# Altium PCB Arm_controller.PcbDoc
Units mm, origin at the board's own origin, x right, y up, seen from the top; angles counter-clockwise.
Board outline 56.8 x 61.9 mm, 2 copper layers (Top Layer, Bottom Layer); 63 components, 57 nets, 260 pads, 164 vias.
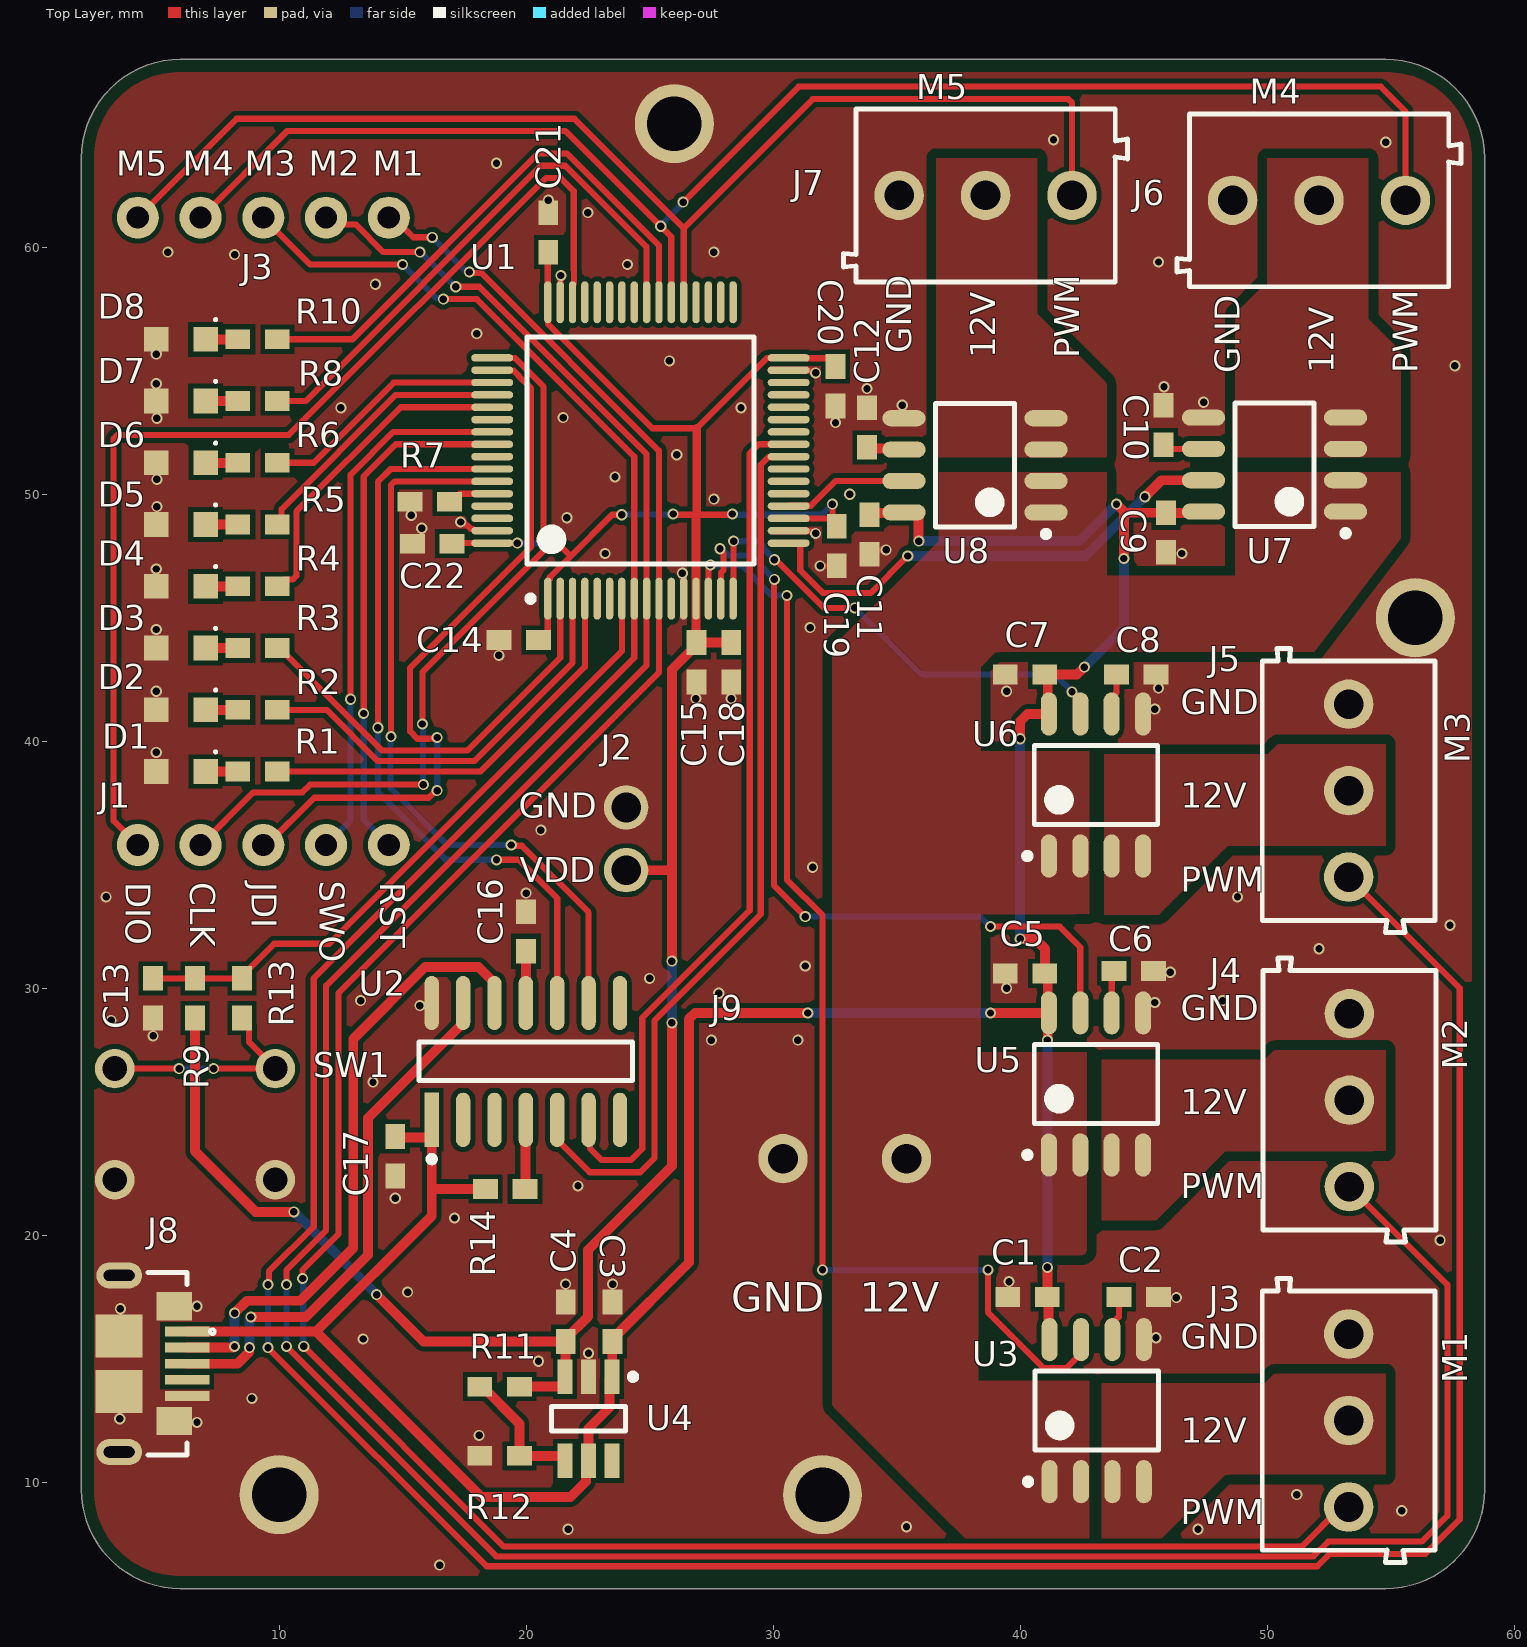
[diagram p0: Top Layer view]
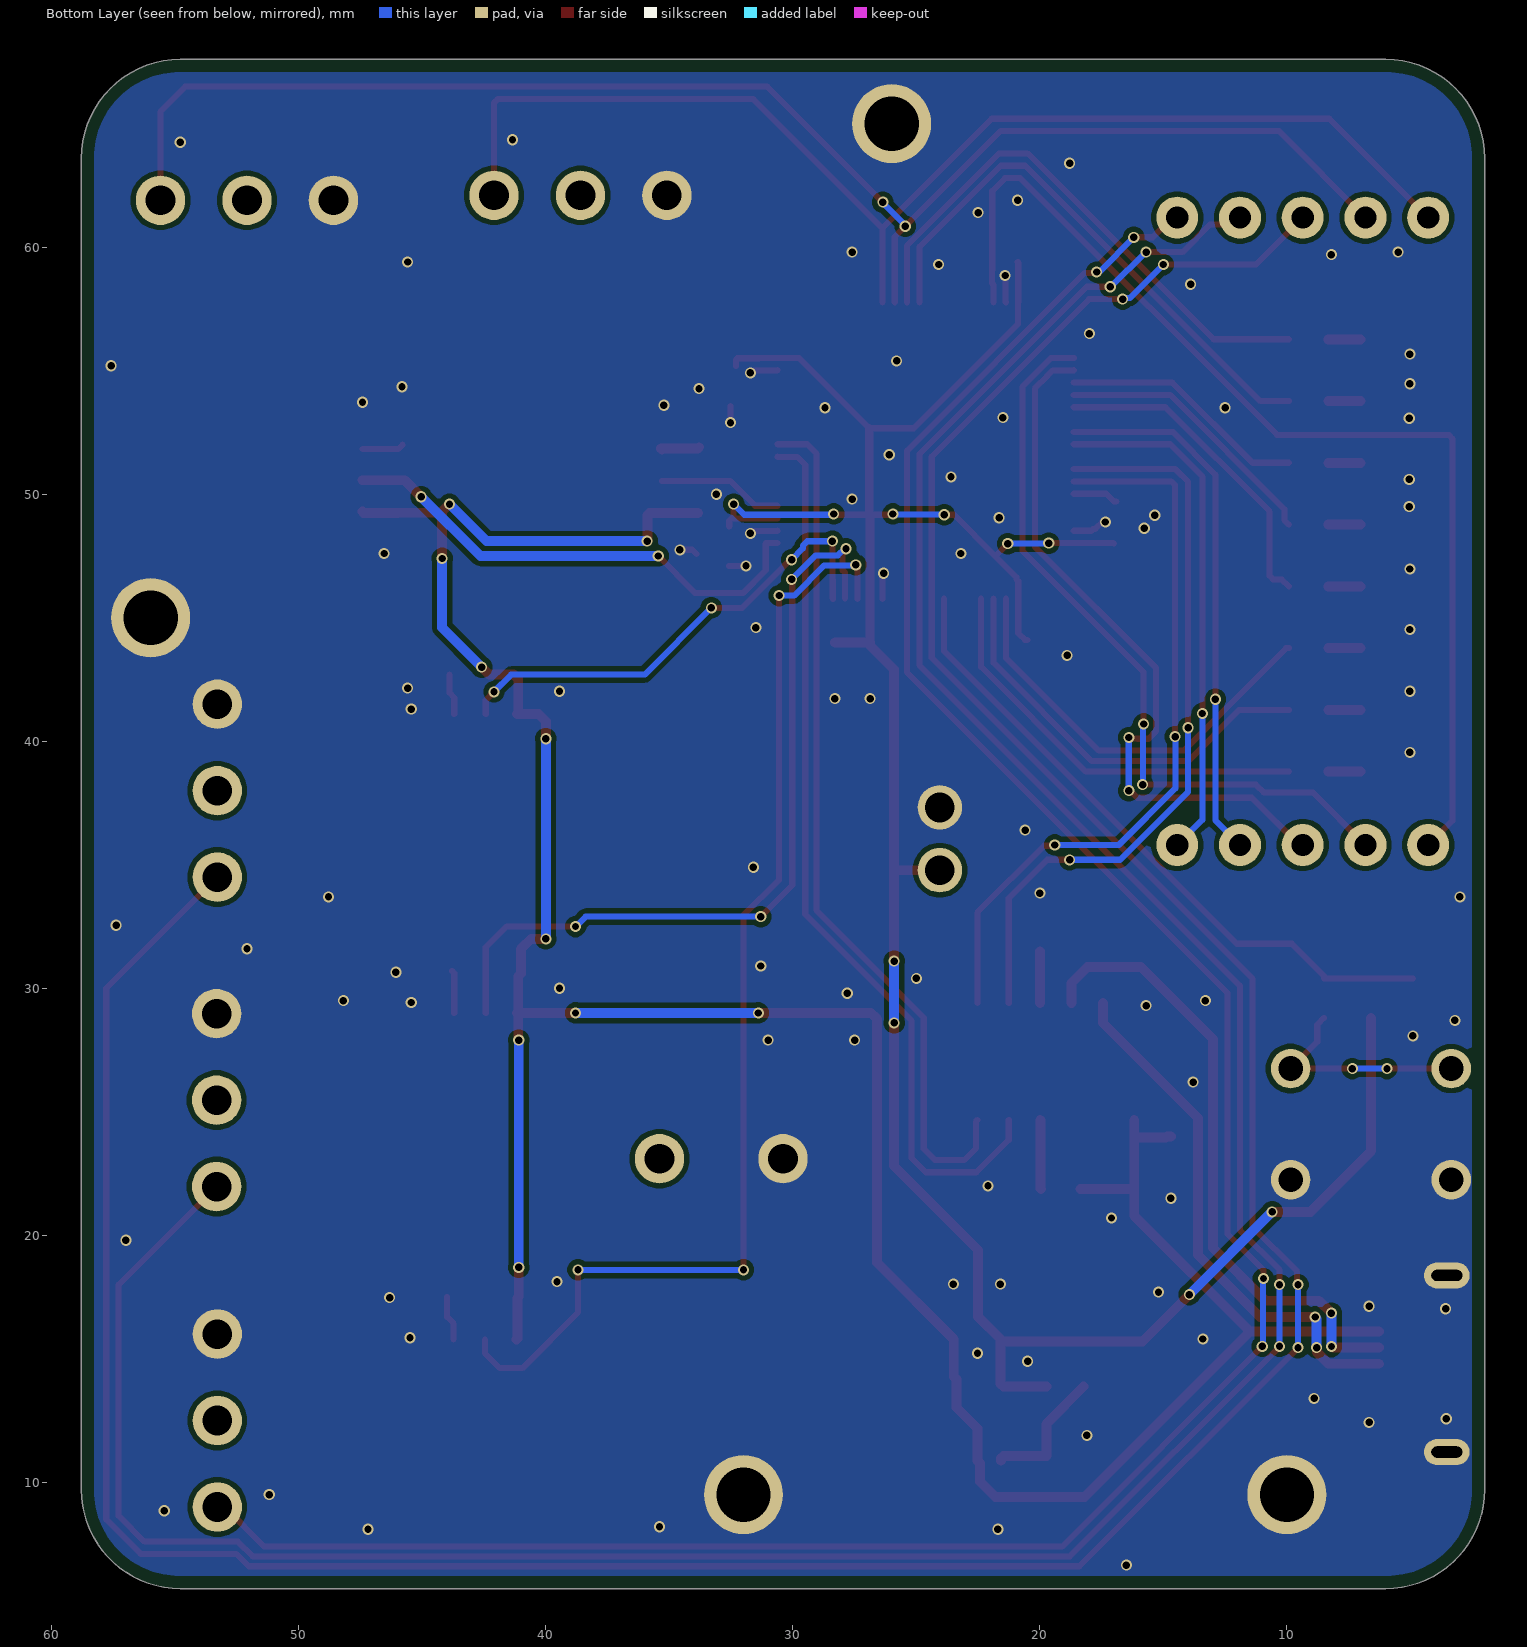
[diagram p1: Bottom Layer view, seen from below]
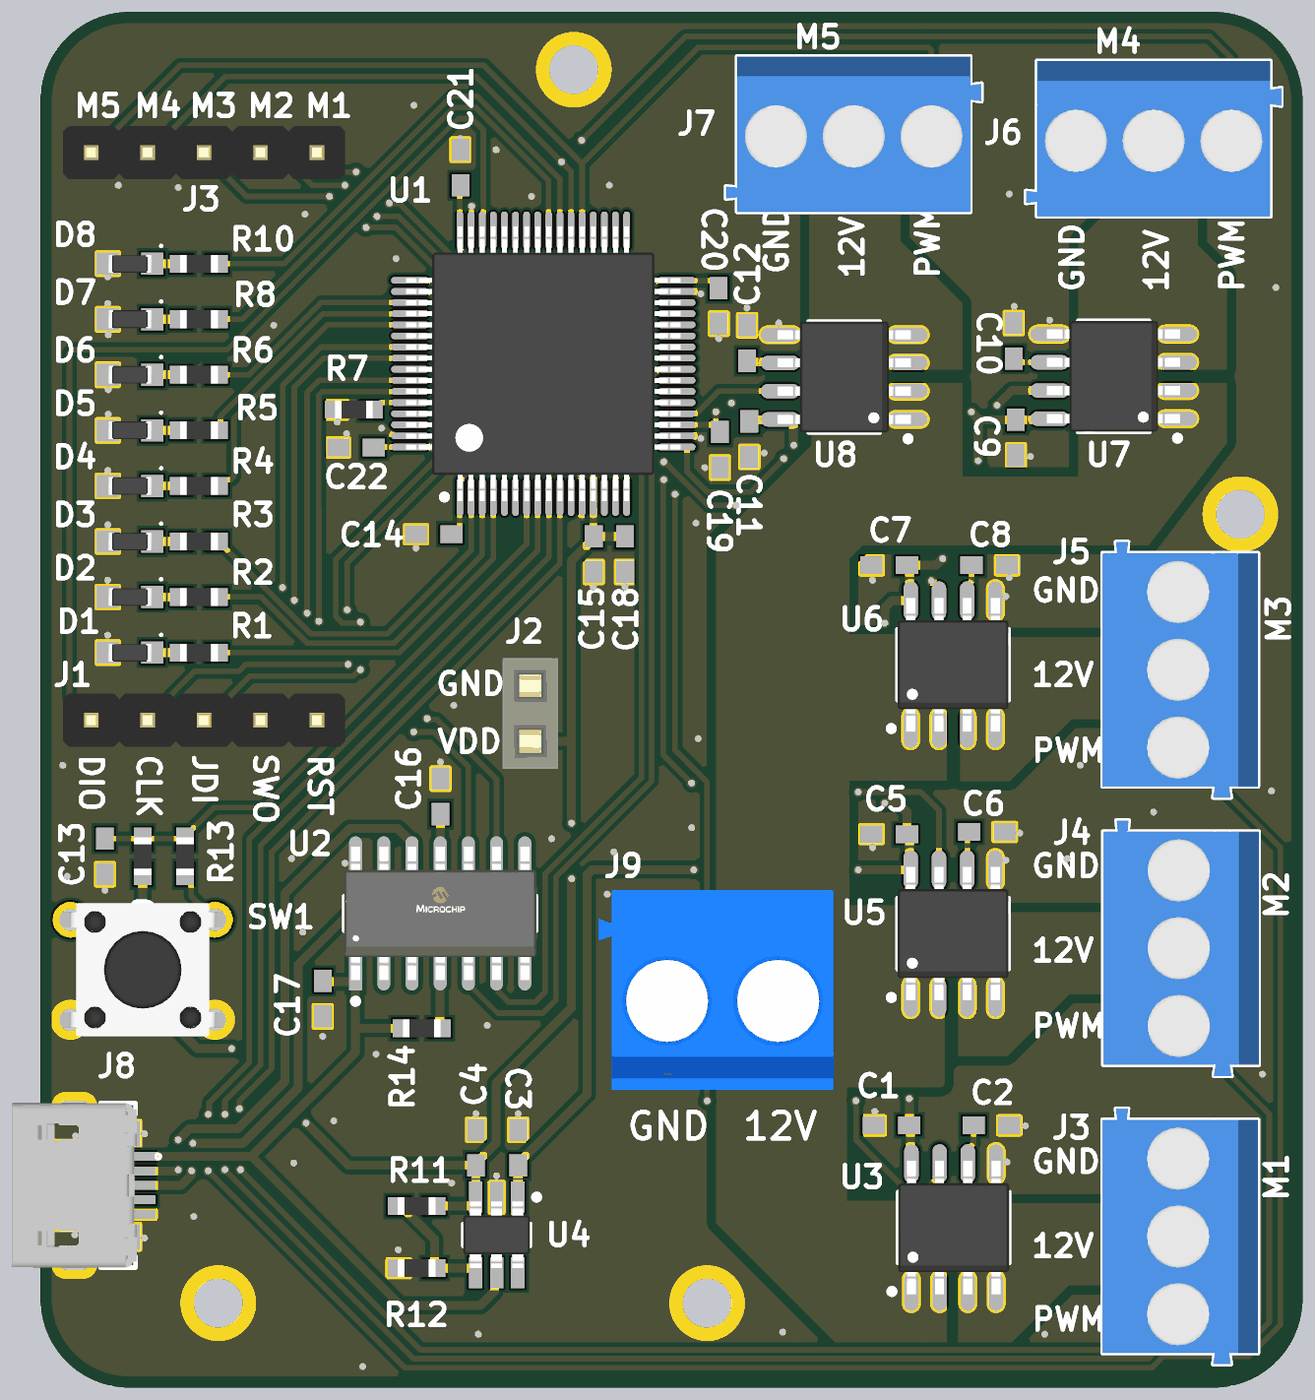
[diagram p2: 3D render of the assembled board from above, using the file's embedded part models]

## Layer stack, top to bottom
Top Solder: solder mask 0.0102, Solder Resist, Dk 3.5
Top Layer: signal copper 0.0356
Dielectric 1: dielectric 0.32, FR-4, Dk 4.8
Bottom Layer: signal copper 0.0356
Bottom Solder: solder mask 0.0102, Solder Resist, Dk 3.5

## Board outline
6,5.7 cw(c6,9.7) 2,9.7 2,63.6 cw(c6,63.6) 6,67.6 54.8,67.6 cw(c54.8,63.6) 58.8,63.6 58.8,9.7 cw(c54.8,9.7) 54.8,5.7

## Design rules (kind name [scope] priority, off if disabled: settings)
BoardOutlineClearance [All] p1: gap=0.254 ignorepadtopadclearanceinfootprint=FALSE except(0: Arc-SplitContinuation Track-SplitContinuation SMDPad-SplitContinuation THPad-SplitContinuation Via-SplitContinuation Fill-SplitContinuation Poly-SplitContinuation Region-SplitContinuation Text-SplitContinuation; 0.5: Arc-OutlineEdge Track-OutlineEdge SMDPad-OutlineEdge THPad-OutlineEdge Via-OutlineEdge Fill-OutlineEdge Poly-OutlineEdge Region-OutlineEdge Text-OutlineEdge)
Clearance [All] p1: gap=0.254 ignorepadtopadclearanceinfootprint=FALSE except(0.15: Arc-Track Arc-SMDPad Arc-THPad Arc-Via Arc-Hole Track-Track Track-SMDPad Track-THPad Track-Via Track-Hole SMDPad-SMDPad SMDPad-Via SMDPad-Hole THPad-Via THPad-Hole Via-Via Via-Hole Fill-Hole Poly-Hole Region-Hole Text-Hole; 0.2: Arc-Arc Arc-Poly Track-Poly SMDPad-THPad SMDPad-Poly THPad-THPad THPad-Poly Via-Poly Fill-Poly; 0.4: Poly-Poly)
MinimumSolderMaskSliver [All] p1: minsoldermaskwidth=0.2
PlaneClearance [All] p1: clearance=0.6
PlaneConnect [All] p1: planeconnectstyle=Direct reliefexpansion=0.508 reliefentries=4 reliefconductorwidth=0.254 reliefairgap=0.254
PolygonConnect [All] p1: connectstyle=Direct reliefconductorwidth=0.254 reliefentries=4 polygonreliefangle="90 Angle" airgapwidth=0.254
RoutingVias [All] p1: holewidth=0.2 width=0.6 viastyle="Through Hole" minholewidth=0.15 minwidth=0.3 maxholewidth=1 maxwidth=2
SilkToSilkClearance [All] p1: silktosilkclearance=0.2
SilkToSolderMaskClearance [IsPad] p1: minsilkscreentomaskgap=0.1 clearancetoexposedcopper=TRUE
SolderMaskExpansion [All] p1: expansion=0.102 istentingtop=FALSE
SupplyNets "Schematic Supply Nets_3" [InNet('12V')] p1: voltage=0.000
SupplyNets "Schematic Supply Nets_2" [InNet('VDD_CAP_filter_1')] p2: voltage=0.000
SupplyNets "Schematic Supply Nets_1" [InNet('VUSB (5V)')] p3: voltage=0.000
SupplyNets "Schematic Supply Nets" [InNet('GND')] p4: voltage=0.000
Width [All] p1: maxlimit=5 minlimit=0.2 preferedwidth=0.4
25 further rules are at their usual default settings.

## Classes and differential pairs
component class Signal_and_supply: C1 C2 C3 C4 C5 C6 C7 C8 C9 C10 C11 C12 J3 J4 J5 J6 J7 J9 R11 R12 U3 U4 U5 U6 U7 U8
component class MCU: C13 C14 C15 C16 C17 C18 C19 C20 C21 C22 D1 D2 D3 D4 D5 D6 D7 D8 J1 J3 J8 R1 R2 R3 R4 R5 R6 R7 R8 R9 R10 R13 R14 SW1 U1 U2

## Components (designator, comment, footprint, x,y, rotation, side; value= is the part's Value field where it differs from the comment)
C1 "Capacitor 0603 generic" CAPC1608X08N 40.3,17.5 r180 top
C2 "Capacitor 0603 generic" CAPC1608X08N 44.8,17.5 r0 top
C3 "Capacitor 0603 generic" CAPC1608X08N 23.5,16.5 r270 top
C4 "Capacitor 0603 generic" CAPC1608X08N 21.6,16.5 r90 top
C5 "Capacitor 0603 generic" CAPC1608X08N 40.2,30.6 r180 top
C6 "Capacitor 0603 generic" CAPC1608X08N 44.6,30.7 r0 top
C7 "Capacitor 0603 generic" CAPC1608X08N 40.2,42.7 r180 top
C8 "Capacitor 0603 generic" CAPC1608X08N 44.7,42.7 r0 top
C9 "Capacitor 0603 generic" CAPC1608X08N 45.9,48.45 r270 top
C10 "Capacitor 0603 generic" CAPC1608X08N 45.8,52.8 r90 top
C11 "Capacitor 0603 generic" CAPC1608X08N 33.9,48.375 r270 top
C12 "Capacitor 0603 generic" CAPC1608X08N 33.8,52.7 r90 top
C13 "Capacitor 0603 generic" CAPC1608X08N 4.9,29.6 r90 top
C14 "Capacitor 0603 generic" CAPC1608X08N 19.7,44.1 r180 top
C15 "Capacitor 0603 generic" CAPC1608X08N 26.9,43.2 r270 top
C16 "Capacitor 0603 generic" CAPC1608X08N 20,32.3 r90 top
C17 "Capacitor 0603 generic" CAPC1608X08N 14.7,23.2 r270 top
C18 "Capacitor 0603 generic" CAPC1608X08N 28.304,43.198 r270 top
C19 "Capacitor 0603 generic" CAPC1608X08N 32.575,47.9 r270 top
C20 "Capacitor 0603 generic" CAPC1608X08N 32.525,54.375 r270 top
C21 "Capacitor 0603 generic" CAPC1608X08N 20.9,60.6 r90 top
C22 "Capacitor 0603 generic" CAPC1608X08N 16.2,48 r180 top
D1 "KP-1608ZGC" DIOM1608X11N 6.028,38.772 r0 top
D2 "KP-1608ZGC" DIOM1608X11N 6.028,41.272 r0 top
D3 "KP-1608ZGC" DIOM1608X11N 6.028,43.772 r0 top
D4 "KP-1608ZGC" DIOM1608X11N 6.028,46.272 r0 top
D5 "KP-1608ZGC" DIOM1608X11N 6.028,48.772 r0 top
D6 "KP-1608ZGC" DIOM1608X11N 6.028,51.272 r0 top
D7 "KP-1608ZGC" DIOM1608X11N 6.028,53.772 r0 top
D8 "KP-1608ZGC" DIOM1608X11N 6.028,56.272 r0 top
J1 "Header-2.54-ZL201-05G" Header-2.54-ZL201-05G-Footprint-1 9.36,35.8 r0 top
J2 "2_pin_f_2_54" 2_pin_f_2_54-Footprint-1 24.05,36.05 r180 top
J3 "691103110003" 691103110003 53.3,12.5 r90 top
J3 "Header-2.54-ZL201-05G" Header-2.54-ZL201-05G-Footprint-1 9.36,61.2 r180 top
J4 "691103110003" 691103110003 53.328,25.472 r90 top
J5 "691103110003" 691103110003 53.3,38 r90 top
J6 "691103110003" 691103110003 52.1,61.9 r180 top
J7 "691103110003" 691103110003 38.6,62.1 r180 top
J8 "USB3076" USB3076-XX-X_revC 3.5,14.8 r270 top
J9 "5mmScrewTerminal" 5mmScrewTerminal-Footprint-1 32.9,23.1 r0 top
R1 "Resistor 0603 generic" RESC1608X04N 9.128,38.772 r180 top
R2 "Resistor 0603 generic" RESC1608X04N 9.128,41.272 r180 top
R3 "Resistor 0603 generic" RESC1608X04N 9.128,43.772 r180 top
R4 "Resistor 0603 generic" RESC1608X04N 9.128,46.272 r180 top
R5 "Resistor 0603 generic" RESC1608X04N 9.128,48.772 r180 top
R6 "Resistor 0603 generic" RESC1608X04N 9.128,51.272 r180 top
R7 "Resistor 0603 generic" RESC1608X04N 16.1,49.7 r0 top
R8 "Resistor 0603 generic" RESC1608X04N 9.128,53.772 r180 top
R9 "Resistor 0603 generic" RESC1608X04N 6.6,29.6 r90 top
R10 "Resistor 0603 generic" RESC1608X04N 9.128,56.272 r180 top
R11 "Resistor 0603 generic" RESC1608X04N 18.928,13.872 r180 top
R12 "Resistor 0603 generic" RESC1608X04N 18.928,11.072 r180 top
R13 "Resistor 0603 generic" RESC1608X04N 8.5,29.6 r270 top
R14 "Resistor 0603 generic" RESC1608X04N 19.158,21.872 r180 top
SW1 "NRST" "Button 6mm tht-Footprint-1" 6.6,24.5 r0 top
U1 "STM32F303RDT7" LQFP50P1235X1235X165-64N 24.628,51.772 r90 top
U2 "mcp2221_usb_uart" FP-C04-065-SL-IPC_B 19.988,27.038 r90 top
U3 "ACS712" SOIC127P600X175-8N 43.1,12.9 r90 top
U4 "MAX8880EUT+T" SOT95P280X145-6N 22.528,12.572 r270 top
U5 "ACS712" SOIC127P600X175-8N 43.072,26.128 r90 top
U6 "ACS712" SOIC127P600X175-8N 43.072,38.228 r90 top
U7 "ACS712" SOIC127P600X175-8N 50.3,51.2 r180 top
U8 "ACS712" SOIC127P600X175-8N 38.172,51.172 r180 top

## Footprints (in the part's own frame and the unit in brackets; to place one, negate y for a bottom-side part, rotate by r counter-clockwise, add the part's x,y. Pads: shape width x height; smd on the part's side, far side on the other; paste and mask are expansions set on the pad)
2_pin_f_2_54-Footprint-1 [mm]
  round 1.8 hole 1.2: 1(0,1.27) 2(0,-1.27)
  body extent -1.25,-2.48 1.25,2.52, height 9
5mmScrewTerminal-Footprint-1 [mm]
  round 2 hole 1.2: 1(-2.5,0) 2(2.5,0)
  body extent -5.8,-4 4.8,5, height 12.6
691103110003 [mm] "3,50mm - modular - blue - Horizontal wire entry - Pressure clamp - 8,4mm height - 03p"
  round 2 hole 1.2: 1(-3.5,0) 2(0,0) 3(3.5,0)
  silkscreen extent -5.75,-3.5 5.75,3.5, body extent -5.75,-3.5 5.75,3.5, height 8.45
"Button 6mm tht-Footprint-1" [mm]
  round 1.6 hole 1: 1(-3.25,2.25) 1(3.25,2.25) 2(-3.25,-2.25) 2(3.25,-2.25)
  body extent -3.95,-3 3.95,3, height 5
CAPC1608X08N [mm] "Chip Capacitor, 2-Leads, Body 1,60x0,75mm, IPC Medium Density"
  rect 1x0.8 smd: 1(-0.8,0) 2(0.8,0)
  body extent -0.85,-0.4 0.85,0.4, height 0.8
DIOM1608X11N [mm] "Molded Diode, 2-Leads, Body 1,60x0,80mm, IPC Medium Density"
  rect 1x1 smd: 1(-1,0) 2(1,0)
  silkscreen extent 1.35,0.75 1.45,0.85, body extent -1.02,-0.4 1.02,0.4, height 1.1
FP-C04-065-SL-IPC_B [mm]
  rect 2.2x0.582 smd paste+0 mask+0: 1(-2.366,3.81)
  rrect100% 2.2x0.582 smd paste+0 mask+0: 2(-2.366,2.54) 3(-2.366,1.27) 4(-2.366,0) 5(-2.366,-1.27) 6(-2.366,-2.54) 7(-2.366,-3.81) 8(2.366,-3.81) 9(2.366,-2.54) 10(2.366,-1.27) 11(2.366,0) 12(2.366,1.27) 13(2.366,2.54) 14(2.366,3.81)
  silkscreen extent -4.08,-4.33 0.78,4.33, body extent -3.7,-4.57 3.7,4.57, height 0.25
Header-2.54-ZL201-05G-Footprint-1 [mm]
  round 1.7 hole 0.9: 1(-5.08,0) 2(-2.54,0) 3(0,0) 4(2.54,0) 5(5.08,0)
  body extent -6.35,-1.27 6.35,1.13, height 8.56
LQFP50P1235X1235X165-64N [mm] "SQFP, 64-Leads, Body 10,00x10,00mm, Pitch 0,50mm, IPC Medium Density"
  oval 1.7x0.3 smd: 1(-6,3.75) 2(-6,3.25) 3(-6,2.75) 4(-6,2.25) 5(-6,1.75) 6(-6,1.25) 7(-6,0.75) 8(-6,0.25) 9(-6,-0.25) 10(-6,-0.75) 11(-6,-1.25) 12(-6,-1.75) 13(-6,-2.25) 14(-6,-2.75) 15(-6,-3.25) 16(-6,-3.75) 33(6,-3.75) 34(6,-3.25) 35(6,-2.75) 36(6,-2.25) 37(6,-1.75) 38(6,-1.25) 39(6,-0.75) 40(6,-0.25) 41(6,0.25) 42(6,0.75) 43(6,1.25) 44(6,1.75) 45(6,2.25) 46(6,2.75) 47(6,3.25) 48(6,3.75)
  oval 0.3x1.7 smd: 17(-3.75,-6) 18(-3.25,-6) 19(-2.75,-6) 20(-2.25,-6) 21(-1.75,-6) 22(-1.25,-6) 23(-0.75,-6) 24(-0.25,-6) 25(0.25,-6) 26(0.75,-6) 27(1.25,-6) 28(1.75,-6) 29(2.25,-6) 30(2.75,-6) 31(3.25,-6) 32(3.75,-6) 49(3.75,6) 50(3.25,6) 51(2.75,6) 52(2.25,6) 53(1.75,6) 54(1.25,6) 55(0.75,6) 56(0.25,6) 57(-0.25,6) 58(-0.75,6) 59(-1.25,6) 60(-1.75,6) 61(-2.25,6) 62(-2.75,6) 63(-3.25,6) 64(-3.75,6)
  silkscreen extent -6.12,-4.6 4.6,4.6, body extent -6.17,-6.17 6.17,6.17, height 1.65
RESC1608X04N [mm] "Chip Resistor, 2-Leads, Body 1,60x0,75mm, IPC Medium Density"
  rect 1x0.8 smd: 1(-0.8,0) 2(0.8,0)
  body extent -0.85,-0.4 0.85,0.4, height 0.4
SOIC127P600X175-8N [mm] "SOIC, 8-Leads, Body 4,90x3,90mm, Pitch 1,27mm, IPC Medium Density"
  oval 1.75x0.65 smd: 1(-2.875,1.905) 2(-2.875,0.635) 3(-2.875,-0.635) 4(-2.875,-1.905) 5(2.875,-1.905) 6(2.875,-0.635) 7(2.875,0.635) 8(2.875,1.905)
  silkscreen extent -3,-2.5 1.6,2.9, body extent -3,-2.5 3,2.5, height 1.75
SOT95P280X145-6N [mm] "SOT23, 6-Leads, Body 2,90x2,80mm, Pitch 0,95mm, IPC Medium Density"
  rect 1.4x0.6 smd: 1(-1.7,0.95) 2(-1.7,0) 3(-1.7,-0.95) 4(1.7,-0.95) 5(1.7,0) 6(1.7,0.95)
  silkscreen extent -1.82,-1.5 0.5,1.93, body extent -1.5,-1.5 1.5,1.5, height 1.45
USB3076-XX-X_revC [mm] "Micro USB Receptacle, Type B, SMT, Horizontal, Bottom Mount, without Peg, with Outer Shell Stakes, without Mating Face Lead-In"
  rect 0.4x1.8 smd: 1(-1.3,2.775) 2(-0.65,2.775) 3(0,2.775) 4(0.65,2.775) 5(1.3,2.775)
  oval 1.05x1.85 hole 0.45 slot 1.25 at 90 deg: S(-3.575,0.025) S(3.575,0.025)
  rect 1.15x1.45 smd: S(-2.32,2.255) S(2.32,2.255)
  rect 1.75x1.9 smd: S(-1.125,0.025) S(1.125,0.025)
  silkscreen extent -3.7,1.2 3.7,3.9, body extent -3.7,-2.77 3.7,2.83, height 2.69

## Part data
C1 C5 C7 C9 C11: library part CMP-001-00083-2, "Generic 0603 capacitor. No set voltage/capacitance rating.", Capacitance="0.1 uF"
C2 C6 C8 C10 C12: library part CMP-001-00083-2, "Generic 0603 capacitor. No set voltage/capacitance rating.", Capacitance="1 nF"
C3 C13 C16 C18: library part CMP-001-00083-2, "Generic 0603 capacitor. No set voltage/capacitance rating.", Capacitance="1 uF"
C4 C14 C17: library part CMP-001-00083-2, "Generic 0603 capacitor. No set voltage/capacitance rating.", Capacitance="4.7 uF"
C15: library part CMP-001-00083-2, "Generic 0603 capacitor. No set voltage/capacitance rating.", Capacitance="10 nF"
C19 C20 C21 C22: library part CMP-001-00083-2, "Generic 0603 capacitor. No set voltage/capacitance rating.", Capacitance="100 nF"
D1 D2 D3 D4 D5 D6 D7 D8: library part CMP-007-00036-1, "Single Color LED, Green, Water Clear, 1.2mm", Forward Current=25mA, Max Operating Temperature=85°C, Min Operating Temperature=-40°C, Mounting Technology="Surface Mount", Pins=2, RoHS Compliant=Yes
J1 J3: library part CMP-00028-00007-3, "Male header, pitch 2.54 mm, 1x5 pins"
J2: library part CMP-00028-00011-1, "2 pin female header, 2.54 mm pitch."
J3 J4 J5 J6 J7: library part CMP-00028-00008-2, "Barrier Strip Terminal Block", RoHS Compliant=Yes
J8: library part CMP-003-000000-4, "Micro USB Receptacle, Type B, SMT, Horizontal, Bottom Mount, without Peg, with Outer Shell Stakes, without Mating Face Lead-In", Component Type=Standard, Design Item ID=USB3076-XX-X_revC, Pin Count=6, Source=USB3076-XX-X_revC.SchLib
J9: library part CMP-00028-00010-3, "16A 5 mm pitch screw terminal, 2 sockets."
R1 R2 R3 R4 R5 R6 R8 R10: library part CMP-009-00177-2, "Generic 0603 resistor, no fixed value.", Resistance=220
R7 R9 R14: library part CMP-009-00177-2, "Generic 0603 resistor, no fixed value.", Resistance=10k
R11: library part CMP-009-00177-2, "Generic 0603 resistor, no fixed value.", Resistance=100k
R12: library part CMP-009-00177-2, "Generic 0603 resistor, no fixed value.", Resistance=160k
R13: library part CMP-009-00177-2, "Generic 0603 resistor, no fixed value.", Resistance=100
SW1: library part CMP-00028-00009-2, "Button 6mm tht", Pins=2
U1: library part CMP-020-00023-3, "ARM Microcontroller, 32-Bit, FLASH, CORTEX-M4F CPU, 72MHz, CMOS, LQFP64", Case/Package=LQFP, Max Operating Temperature=105°C, Min Operating Temperature=-40°C, Interface=I2C,SPI,USB,CAN,I2S,IrDA,UART,USART,LIN, Pins=64, RoHS Compliant=Yes
U2: library part CMP-015-00009-2, "Usb uart converter.", Case/Package=SOP, Max Operating Temperature=85°C, Max Supply Voltage=5.5V, Min Operating Temperature=-40°C, Min Supply Voltage=3V, Nominal Supply Voltage=3.3V, Pins=14, RoHS Compliant=Yes
U3 U5 U6 U7 U8: library part CMP-010-00024-2, "Integrated, Hall-Effect-Based Linear Current Sensor IC", Case/Package=SOIC8, Max Operating Temperature=85°C, Max Supply Voltage=8V, Min Operating Temperature=-40°C, Min Supply Voltage=4.5V, Nominal Supply Current=10mA, Nominal Supply Voltage=5V, Output Current=3mA, ComponentLink1Description=Datasheet, ComponentLink1URL=https://www.farnell.com/datasheets/3283075.pdf?_gl=1*655fm5*_gcl_aw*R0NMLjE3MjkyNjA3NzYuQ2p3S0NBandqc2k0QmhCNUVpd0FGQUwwWUJJQ1IwTktsZUpReWIxcFRubGxNLVh3bUhQcFctSFhLUnYtVFFUc01qMmhGYkt5YWJZdmpob0N3c0lRQXZEX0J3RQ..*_gcl_au*MTA1Mjg3ODU0LjE3Mjc3MDI1ODg., Mounting Technology=smd, Pins=8, RoHS Compliant=yes, Sensor Type="analog current sensor"
U4: library part CMP-019-00049-1, "Ultra-Low-IQ, Low-Dropout Linear Regulator, output 1.25 - 5.5 V.", Case/Package=SOT-6, Dropout Voltage=100mV, Max Operating Temperature=125°C, Max Supply Voltage=12V, Min Operating Temperature=-40°C, Min Supply Voltage=2.5V, Nominal Supply Current=3mA, Output Current=200mA, Output Voltage=3.3V, Mounting Technology=smd, Pins=6, RoHS Compliant=yes

## Free pads (board coordinates)
  round 3.2 hole 2.2: 0(10,9.5) 0(26,65) 0(32,9.5) 0(56,45)

## Via types
v1: diameter 0.45, hole 0.3, Top Layer to Bottom Layer, tented both sides, 164 vias

## Nets (pads, with @x,y where several pads share a name; then routed paths per layer and width w, separated by ;. In a path a pad name is that pad's centre, name@x,y a point inside that pad or via, vN(x,y) a via of type N, cw(c..) or ccw(c..) an arc to the next point about the centre after c; other vN are vias at no path point)
12V: J9.2 U3.1 U3.2 U5.1 U5.2 U6.1 U6.2 U7.1 U7.2 U8.1 U8.2
GND: C1.2 C2.2 C3.1 C4.2 C5.2 C6.2 C7.2 C8.2 C9.2 C10.2 C11.2 C12.2 C13.1 C14.2 C15.2 C16.2 C17.2 C18.2 C19.2 C20.2 C21.2 C22.2 D1.1 D2.1 D3.1 D4.1 D5.1 D6.1 D7.1 D8.1 J2.2 J3.3@53.3,16 J4.3 J5.3 J6.3 J7.3 J8.5 J8.S J9.1 pad.0 R7.1 R12.2 SW1.2 U1.12 U1.18 U1.31 U1.47 U1.63 U2.14 U3.5 U4.2 U5.5 U6.5 U7.5 U8.5 | length 7.9
  Top Layer w0.25: v1(17.35,48.875) 17.36,48.865 17.484,48.865 17.752,48.597 17.84,48.597 17.915,48.522 U1.63 ; U1.47 21.388,57.781 21.388,58.834 v1(21.407,58.854) ; v1(26.325,46.8) 26.325,46.786 26.369,46.743 26.369,45.781 U1.12 ; U1.18 30.638,48.512 31.567,48.512 31.666,48.413 v1(31.72,48.413) ; U1.31 30.638,55.012 31.567,55.012 31.666,54.913 v1(31.72,54.913) ; v1(31.9,47.1) C19.2 ; v1(32.525,52.9) C20.2 ; C11.2 34.075,47.75 v1(34.575,47.75)
  other v1: 16.5,6.65 21.7,8.1 47.2,8.1 35.4,8.2 55.45,8.85 51.2,9.5 18.1,11.9 6.675,12.425 3.55,12.575 8.9,13.4 20.5,14.9 22.525,15.225 13.4,15.8 45.5,15.85 3.575,17.025 6.675,17.125 46.325,17.475 15.2,17.7 21.6,18.025 23.5,18.025 39.55,18.125 57,19.8 17.1,20.7 14.7,21.5 22.1,22 13.8,26.2 27.5,27.9 31,27.9 4.9,28.075 3.2,28.7 15.7,29.3 45.45,29.425 13.3,29.5 48.2,29.5 27.8,29.8 39.45,30 25,30.4 46.075,30.65 31.3,30.9 52.1,31.6 57.4,32.55 3,33.7 48.8,33.7 20,33.85 31.6,34.9 20.6,36.4 5.025,39.55 45.45,41.3 26.875,41.725 28.3,41.725 5.025,42.025 39.45,42.025 45.6,42.15 18.9,43.475 5.025,44.525 31.5,44.6 5.025,46.975 23.2,47.6 46.55,47.6 15.775,48.625 21.65,49.05 15.35,49.15 5.05,49.5 27.6,49.8 33.1,50 5.05,50.6 23.6,50.7 26.1,51.6 5.05,53.075 21.5,53.1 12.5,53.5 28.7,53.5 35.225,53.6 47.425,53.725 33.8,54.275 45.825,54.35 5.025,54.475 57.6,55.2 25.8,55.4 5.025,55.675 18,56.5 13.9,58.5 24.1,59.3 45.6,59.4 8.2,59.7 5.5,59.8 27.6,59.8 22.5,61.4 20.9,61.9 18.8,63.4 54.8,64.25 41.35,64.35
I2C1_SCL: U1.58 U2.10 | length 30.7
  Top Layer w0.25: v1(14,40.548) 14,50.5 14.522,51.022 U1.58 ; v1(18.8,35.2) 19.7,35.2 21.258,33.642 U2.10
  Bottom Layer w0.25: v1(14,40.548) 14,37.951 16.751,35.2 v1(18.8,35.2)
I2C1_SDA: U1.59 U2.9 | length 30.2
  Top Layer w0.25: v1(14.529,40.186) 14.529,45.321 14.525,45.325 14.525,50.367 14.679,50.522 U1.59 ; v1(19.4,35.8) 19.429,35.771 19.829,35.771 22.528,33.072 U2.9
  Bottom Layer w0.25: v1(14.529,40.186) 14.512,40.17 14.512,38.088 16.8,35.8 v1(19.4,35.8)
JTDI: J1.3 U1.50 | length 29.1
  Top Layer w0.25: J1.3 9.509,35.8 11.422,37.714 16.059,37.714 16.346,38 v1(16.4,38) ; v1(16.4,40.15) 16.362,40.112 16.06,40.112 16.048,40.1 15.6,40.1 15.3,40.4 15.3,42.97 20.2,47.87 20.2,54.283 19.7,54.783 19.7,54.8 19.488,55.012 18.638,55.012 U1.50
  Bottom Layer w0.25: v1(16.4,38) v1(16.4,40.15)
JTDO: J1.4 U1.55 | length 21.9
  Top Layer w0.25: v1(12.895,41.7) 12.895,50.795 14.622,52.522 U1.55
  Bottom Layer w0.25: J1.4 12.895,36.795 v1(12.895,41.7)
JTRST: J1.5 U1.56 | length 21.1
  Top Layer w0.25: v1(13.424,41.124) 13.424,50.724 14.722,52.022 U1.56
  Bottom Layer w0.25: v1(13.424,41.124) 13.424,36.816 J1.5
LED_DEBUG_1: R10.1 U1.39 | length 22.4
  Top Layer w0.25: R10.1 12.972,56.272 20.5,63.8 21.652,63.8 25.378,60.073 U1.39
LED_DEBUG_2: R8.1 U1.40 | length 22.5
  Top Layer w0.25: R8.1 11.072,53.772 20.6,63.3 21.586,63.3 24.869,60.017 24.869,57.781 U1.40
LED_DEBUG_3: R6.1 U1.51 | length 10
  Top Layer w0.25: R6.1 11.394,51.272 14.644,54.522 U1.51
LED_DEBUG_4: R5.1 U1.52 | length 11.1
  Top Layer w0.25: R5.1 10.1,48.943 10.1,49.4 14.722,54.022 U1.52
LED_DEBUG_5: R4.1 U1.53 | length 13.2
  Top Layer w0.25: R4.1 10.203,46.547 10.557,46.547 10.703,46.693 10.703,49.303 14.922,53.522 U1.53
LED_DEBUG_6: R3.1 U1.2 | length 17.1
  Top Layer w0.25: R3.1 10.028,43.772 14.179,39.621 17.621,39.621 21.378,43.378 U1.2
LED_DEBUG_7: R2.1 U1.3 | length 17
  Top Layer w0.25: R2.1 11.928,41.272 14,39.2 17.9,39.2 21.878,43.178 U1.3
LED_DEBUG_8: R1.1 U1.4 | length 17
  Top Layer w0.25: R1.1 18.14,38.772 22.378,43.01 U1.4
MCU_NRST: C13.2 R9.2 R13.1 U1.7 | length 26.6
  Top Layer w0.25: C13.2 R9.2 R13.1 8.5,30.5 9.8,31.8 12.031,31.8 23.878,43.647 U1.7
Motor1_Power: J3.2@53.3,12.5 U3.3 U3.4
Motor1_PWM: J3.1 U1.10 | length 103.4
  Top Layer w0.25: v1(10.95,18.25) 10.95,18.6 12.4,20.05 12.4,29.8 25.378,42.778 U1.10 25.378,51.763 18.184,58.958 17.742,58.958 v1(17.704,58.996) ; v1(11,15.5) 19.1,7.4 51.4,7.4 53,9 J3.1@53.3,9 ; J3.1@14.44,61.2 14.63,61.2 15.43,60.4 v1(16.2,60.4)
  Bottom Layer w0.25: v1(10.95,18.25) 10.975,18.225 10.975,15.525 v1(11,15.5) ; v1(16.2,60.4) 17.565,59.035 17.665,59.035 v1(17.704,58.996)
Motor2_Power: J4.2 U5.3 U5.4
Motor2_PWM: J3.2@11.9,61.2 J4.1 U1.9 | length 125.3
  Top Layer w0.25: v1(10.3,15.5) 10.3,15.493 18.793,7 51.866,7 52.466,7.6 56.254,7.6 57.3,8.646 57.3,18 J4.1 ; v1(10.3,18) 10.3,18.6 11.9,20.2 11.9,30.1 24.878,43.078 U1.9 24.878,51.622 18.1,58.4 v1(17.15,58.4) ; J3.2@11.9,61.2 12.177,60.923 13.103,60.923 14.226,59.8 v1(15.7,59.8)
  Bottom Layer w0.25: v1(10.3,15.5) v1(10.3,18) ; v1(15.7,59.8) 15.725,59.8 17.125,58.4 v1(17.15,58.4)
Motor3_Power: J5.2 U6.3 U6.4
Motor3_PWM: J3.3@9.36,61.2 J5.1 U1.8 | length 141.8
  Top Layer w0.25: J3.3@9.36,61.2 11.26,59.3 v1(15,59.3) ; v1(9.55,15.45) 18.4,6.6 52.031,6.6 52.531,7.1 56.401,7.1 57.8,8.499 57.8,30 J5.1 ; v1(9.55,18) 9.588,18.038 9.588,18.538 11.4,20.35 11.4,30.4 24.378,43.378 U1.8 24.378,51.522 18,57.9 v1(16.65,57.9)
  Bottom Layer w0.25: v1(9.55,15.45) v1(9.55,18) ; v1(15,59.3) 16.362,57.938 16.612,57.938 v1(16.65,57.9)
Motor4_Power: J6.2 U7.3 U7.4
Motor4_PWM: J3.4 J6.1 U1.38 | length 61
  Top Layer w0.25: J3.4 10.32,64.7 21.6,64.7 25.878,60.422 U1.38 ; v1(26.356,61.825) 31.031,66.5 54.6,66.5 55.6,65.5 J6.1@55.6,62.381
  Bottom Layer w0.25: v1(25.45,60.85) 25.45,60.884 26.356,61.791 v1(26.356,61.825)
Motor5_Power: J7.2 U8.3 U8.4
Motor5_PWM: J3.5 J7.1 U1.37 | length 50.3
  Top Layer w0.25: J3.5 8.28,65.2 21.954,65.2 26.378,60.776 ; U1.37 26.378,60.776 ; J7.1 42.1,65.854 41.954,66 31.603,66 26.378,60.776
NetC2_1: C2.1 U3.6 | length 1.8
  Top Layer w0.25: U3.6 43.735,16.433 44,16.698 C2.1
NetC6_1: C6.1 U5.6 | length 1.7
  Top Layer w0.25: U5.6 43.707,30.607 C6.1
NetC8_1: C8.1 U6.6 | length 1.7
  Top Layer w0.25: U6.6 43.707,41.762 43.9,41.955 C8.1
NetC10_1: C10.1 U7.6 | length 1.7
  Top Layer w0.25: C10.1 45.965,51.835 U7.6
NetC12_1: C12.1 U8.6 | length 1.6
  Top Layer w0.4: C12.1 33.847,51.853 U8.6@35.35,51.853 ; U8.6@35.25,51.853 U8.6
NetC16_1: C16.1 U2.11 | length 2.1
  Top Layer w0.4: U2.11 19.994,29.409 C16.1@19.994,31.494
NetD1_2: D1.2 R1.2 | length 1.3
  Top Layer w0.4: D1.2 R1.2
NetD2_2: D2.2 R2.2 | length 1.3
  Top Layer w0.4: D2.2 R2.2
NetD3_2: D3.2 R3.2 | length 1.3
  Top Layer w0.4: D3.2 R3.2
NetD4_2: D4.2 R4.2 | length 1.3
  Top Layer w0.4: D4.2 R4.2
NetD5_2: D5.2 R5.2 | length 1.3
  Top Layer w0.4: D5.2 R5.2
NetD6_2: D6.2 R6.2 | length 1.3
  Top Layer w0.4: D6.2 R6.2
NetD7_2: D7.2 R8.2 | length 1.3
  Top Layer w0.4: D7.2 R8.2
NetD8_2: D8.2 R10.2 | length 1.3
  Top Layer w0.4: D8.2 R10.2
NetJ8_2: J8.2 U2.12 | length 25.6
  Top Layer w0.4: J8.2 8.136,15.45 8.182,15.496 v1(8.196,15.496) ; v1(8.2,16.85) 8.7,17.35 10.863,17.35 13,19.487 13,27.941 15.913,30.854 18.077,30.854 18.718,30.213 U2.12
  Bottom Layer w0.4: v1(8.196,15.496) 8.198,15.498 8.198,16.848 v1(8.2,16.85)
NetJ8_3: J8.3 U2.13 | length 21.7
  Top Layer w0.4: J8.3 8.313,14.8 8.79,15.277 8.79,15.44 v1(8.8,15.45) ; v1(8.857,16.693) 11.093,16.693 13.6,19.2 13.6,24.746 17.448,28.595 U2.13
  Bottom Layer w0.4: v1(8.8,15.45) 8.8,16.623 8.857,16.68 v1(8.857,16.693)
NetR7_2: R7.2 U1.60 | length 1.9
  Top Layer w0.25: R7.2 17,49.7 17.322,50.022 U1.60
NetR11_2: R11.2 R12.1 U4.4 | length 5.4
  Top Layer w0.4: R11.2@18.228,13.872 19.728,12.372 R12.1 21.478,11.072 21.578,10.972 U4.4
NetR13_2: R13.2 SW1.1 | length 9.1
  Top Layer w0.25: SW1.1@3.35,26.75 v1(5.95,26.75) ; v1(7.35,26.75) 9.85,26.75 8.775,27.825 8.775,28.525 R13.2
  Bottom Layer w0.25: v1(5.95,26.75) v1(7.35,26.75)
NetR14_1: R14.1 U2.4 | length 2.8
  Top Layer w0.4: R14.1 19.973,21.887 19.973,24.657 U2.4
NetU1_14: U1.14 U3.7 | length 46.8
  Top Layer w0.25: U1.14 27.378,47.007 27.457,47.086 v1(27.457,47.14) ; v1(30.558,45.9) 30.558,34.392 32,32.95 v1(32,18.6) ; v1(38.7,18.6) 38.7,16.871 40.946,14.625 41.865,14.625 42.465,15.225 U3.7
  Bottom Layer w0.25: v1(27.457,47.14) 27.476,47.121 28.731,47.121 29.952,45.9 v1(30.558,45.9) ; v1(32,18.6) v1(38.7,18.6)
NetU1_15: U1.15 U5.7 | length 33.3
  Top Layer w0.25: v1(27.85,47.795) 27.85,47.74 27.986,47.604 27.986,46.921 27.888,46.822 U1.15@27.888,45.782 ; v1(30.05,46.55) 30.029,46.529 30.029,34.171 v1(31.3,32.9) ; v1(38.8,32.5) 41.6,32.5 42.437,31.663 U5.7
  Bottom Layer w0.25: v1(27.85,47.795) 27.904,47.795 28.178,47.521 29.079,47.521 v1(30.05,46.55) ; v1(31.3,32.9) 38.387,32.9 38.787,32.5 v1(38.8,32.5)
NetU1_16: U1.16 U6.7 | length 19.7
  Top Layer w0.25: U1.16 28.388,45.781 28.388,46.517 28.4,46.528 v1(28.4,48.1) ; v1(30.05,47.35) 30.104,47.35 32.054,45.4 v1(33.3,45.4) ; v1(42.1,42) 42.1,41.995 42.437,41.658 U6.7
  Bottom Layer w0.25: v1(28.4,48.1) 29.418,48.1 29.596,47.921 29.596,47.804 v1(30.05,47.35) ; v1(33.3,45.4) 36,42.7 41.4,42.7 v1(42.1,42)
NetU1_17: U1.17 U7.7 | length 20.2
  Top Layer w0.25: U1.17 31.077,48.022 31.1,47.998 31.1,46.92 32.02,46 33.95,46 v1(35.45,47.5)
  Top Layer w0.4: v1(45.05,49.9) 45.715,50.565 U7.7
  Bottom Layer w0.4: v1(35.45,47.5) 42.65,47.5 v1(45.05,49.9)
NetU1_20: U1.20 U8.7 | length 5.1
  Top Layer w0.25: U1.20 30.638,49.531 31.531,49.531 32.537,50.537 U8.7
SWCLK-JTCK: J1.2 U1.49 | length 30.8
  Top Layer w0.25: J1.2 8.951,37.931 10.946,37.931 11.257,38.243 v1(15.843,38.243) ; v1(15.8,40.7) 15.8,42.8 20.7,47.7 20.7,54.366 19.554,55.512 18.638,55.512 U1.49
  Bottom Layer w0.25: v1(15.8,40.7) 15.821,40.679 15.821,38.264 v1(15.843,38.243)
SWDIO-JTMS: J1.1 U1.46 | length 44.6
  Top Layer w0.25: J1.1 3.3,36.78 3.3,52.254 3.446,52.4 10.4,52.4 20.8,62.8 21.4,62.8 21.927,62.273 21.927,59.082 21.936,59.073 21.936,58.543 21.878,58.485 U1.46
USART1_RX: U1.24 U2.5 | length 36.6
  Top Layer w0.25: U2.5 21.258,23.863 22.571,22.55 24.619,22.55 25.2,23.131 25.2,28.7 29.5,33 29.5,51.194 29.818,51.512 30.619,51.512 U1.24
USART1_TX: U1.25 U2.6 | length 35.4
  Top Layer w0.25: U2.6 22.592,24.608 22.592,23.508 23.05,23.05 24.25,23.05 24.7,23.5 24.7,28.8 29.05,33.15 29.05,51.65 29.422,52.022 U1.25
VDD_CAP_filter_1: C4.1 C14.1 C15.1 C18.1 C19.1 C20.1 C21.1 C22.1 J2.1 R9.1 R11.1 U1.1 U1.13 U1.19 U1.32 U1.48 U1.64 U4.3 | length 110
  Top Layer w0.25: C22.1 17.022,48.022 U1.64 v1(19.644,48.022) ; C14.1 20.6,44.1 20.878,44.378 U1.1 20.878,46.485 20.953,46.56 20.953,46.648 21.803,47.497 ; C21.1@20.9,59.4 20.878,59.378 U1.48 20.888,57.762 20.888,56.89 25.108,52.671 26.906,52.671 29.747,55.512 30.619,55.512 U1.32 ; v1(21.3,48) 21.803,47.497 ; v1(23.871,49.171) 23.477,49.171 21.803,47.497 ; v1(25.95,49.2) 25.978,49.172 26.878,49.172 28.322,49.172 v1(28.35,49.2) ; U1.19 32.478,49.022 32.575,48.925 C19.1 ; U1.32@30.651,55.512 31.373,55.512 31.38,55.505 32.25,55.505 32.3,55.455 C20.1@32.3,55.2 ; C19.1@32.4,49.022 v1(32.4,49.6)
  Top Layer w0.35: C15.1@26.878,44.022 U1.13 26.878,49.172 ; 26.906,49.172 26.906,52.671
  Top Layer w0.4: R9.1 6.6,23.4 9.05,20.95 v1(10.6,20.95) ; v1(13.95,17.6) 15.85,15.7 C4.1 21.589,15.689 21.589,13.982 21.478,13.872 R11.1 ; C4.1@21.6,15.8 22.5,16.7 22.5,19.4 25.9,22.8 v1(25.9,28.6) ; J2.1 25.88,34.78 25.9,34.8 ; v1(25.9,31.1) 25.9,34.8 ; C15.1@26.878,44 26.878,43.878 25.9,42.9 25.9,34.8 ; C15.1 26.901,43.999 C18.1 C18.1
  Bottom Layer w0.25: v1(19.644,48.022) 19.655,48.011 21.289,48.011 v1(21.3,48) ; v1(23.871,49.171) 23.885,49.186 25.936,49.186 v1(25.95,49.2) ; v1(28.35,49.2) 28.378,49.172 31.972,49.172 v1(32.4,49.6)
  Bottom Layer w0.4: v1(10.6,20.95) v1(13.95,17.6) ; v1(25.9,28.6) v1(25.9,31.1)
"VUSB (5V)": C1.1 C3.2 C5.1 C7.1 C9.1 C11.1 C17.1 J8.1 R14.2 U2.1 U3.8 U4.1 U4.5 U5.8 U6.8 U7.8 U8.8 | length 121.2
  Top Layer w0.4: J8.1 11.5,16.1 ; C17.1 14.859,24 14.9,23.959 16.087,23.959 16.178,24.05 U2.1 ; U2.1@16.178,24.015 16.178,21.8 ; R14.2 16.25,21.872 16.178,21.8 ; v1(31.4,29) 26.834,29 26.6,28.766 26.6,18.9 23.489,15.789 23.489,14.282 U4.1 23.378,14.172 23.378,13.022 22.528,12.172 U4.5 22.428,10.772 22.428,10.028 21.8,9.4 18.2,9.4 11.5,16.1 ; C11.1@33.833,49.233 35.808,49.233 35.89,49.151 35.89,48.114 v1(35.9,48.104) ; v1(38.8,29) 38.803,29.003 U5.8 ; v1(40,32) 40.6,32 41,31.6 C5.1 41.119,30.481 41.119,29.051 U5.8 ; v1(40,40.1) 40,40.8 40.303,41.103 U6.8 41.119,41.151 41.119,42.581 41.181,42.581 41.3,42.7 42.3,42.7 v1(42.6,43) ; v1(41.1,18.7) C1.1 41.148,17.453 41.148,15.823 U3.8 ; v1(41.1,27.9) 41.119,27.919 41.119,28.956 U5.8 ; v1(43.9,49.6) 44.2,49.3 ; v1(44.2,47.4) 44.2,49.3 ; C9.1 44.25,49.25 44.2,49.3 ; C9.1@46,49.247 47.377,49.247 U7.8 ; 11.5,16.1 16.178,20.778 16.178,21.8
  Bottom Layer w0.4: v1(31.4,29) v1(38.8,29) ; v1(35.9,48.104) 35.904,48.1 42.4,48.1 v1(43.9,49.6) ; v1(40,32) v1(40,40.1) ; v1(41.1,18.7) v1(41.1,27.9) ; v1(42.6,43) 44.2,44.6 v1(44.2,47.4)
pads on no net: J8.4 U1.5 U1.6 U1.11 U1.21 U1.22 U1.23 U1.26 U1.27 U1.28 U1.29 U1.30 U1.33 U1.34 U1.35 U1.36 U1.41 U1.42 U1.43 U1.44 U1.45 U1.54 U1.57 U1.61 U1.62 U2.2 U2.3 U2.7 U2.8 U4.6

## Polygon pours and split planes (outlines as drawn)
GND on Top Layer "gndt" (solid, remove dead copper, pour order 7): 58.625,5.6 58.625,67.7 2.025,67.7 2.025,5.6
12V on Top Layer "GND" (solid, remove dead copper, pour order 0): 42.8,14.102 42.8,7.5 38,7.5 32.4,13.1 32.4,43.8 36.7,48.1 36.7,50.9 43.5,50.9 43.5,46.7 48.7,46.7 48.7,50.9 55.4,50.9 55.4,48.2 51.877,43.6 39,43.6 38.4,43 38.4,39.6 42.8,39.6 42.8,33 38.4,33 38.4,27.4 42.7,27.4 42.7,19.2 38.3,19.2 38.3,14.102
Motor4_Power on Top Layer "mp" (solid, remove dead copper, pour order 5): 50,58.45 49.85,58.45 48.7,57.3 48.7,51.5 55.4,51.5 55.4,55.8 54.1,57.1 54.1,63.6 50,63.6
Motor5_Power on Top Layer "mp" (solid, remove dead copper, pour order 4): 36.6,51.5 36.6,63.6 40.7,63.6 40.7,57.3 43.5,54.5 43.5,51.5
Motor3_Power on Top Layer "mp" (solid, remove dead copper, pour order 3): 43.4,39.479 50.031,39.479 50.431,39.879 54.8,39.879 54.8,35.779 48.431,35.779 45.631,32.979 43.4,32.979
Motor2_Power on Top Layer "mp" (solid, remove dead copper, pour order 2): 43.3,27.1 49.9,27.1 50.3,27.5 54.8,27.5 54.8,23.4 48.3,23.4 45.5,20.6 43.3,20.6
Motor1_Power on Top Layer "mp" (solid, remove dead copper, pour order 1): 43.3,14 49.9,14 50.3,14.4 54.8,14.4 54.8,10.3 48.3,10.3 45.5,7.5 43.3,7.5
GND on Bottom Layer "gndb" (solid, remove dead copper, pour order 6): 58.904,5.399 58.804,5.499 58.804,67.599 2.104,67.599 2.004,67.699 2.004,5.599

## Silkscreen, mask and mechanical layers (free items; w line width, h text height)
Top Overlay:
  text "M5" at 35.8,66 h1
  text "M4" at 49.3,65.8 h1
  text "M5" at 3.4,62.9 h1
  text "M4" at 6.1,62.9 h1
  text "M3" at 8.6,62.9 h1
  text "M2" at 11.2,62.9 h1
  text "M1" at 13.8,62.9 h1
  text "GND" at 35.6,55.7 h1 r90
  text "12V" at 39,55.5 h1 r90
  text "PWM" at 42.4,55.5 h1 r90
  text "GND" at 48.9,54.9 h1 r90
  text "12V" at 52.7,54.9 h1 r90
  text "PWM" at 56.1,54.9 h1 r90
  text "GND" at 46.5,41.1 h1
  text "M3" at 58.2,39.1 h1 r90
  text "12V" at 46.5,37.3 h1
  text "GND" at 19.7,36.9 h1
  text "SWO" at 11.65,34.35 h1 r270
  text "DIO" at 3.8,34.3 h1 r270
  text "CLK" at 6.4,34.3 h1 r270
  text "JDI" at 8.9,34.3 h1 r270
  text "RST" at 14.1,34.3 h1 r270
  text "VDD" at 19.75,34.3 h1
  text "PWM" at 46.5,33.9 h1
  text "GND" at 46.5,28.7 h1
  text "M2" at 58.1,26.7 h1 r90
  text "12V" at 46.5,24.9 h1
  text "PWM" at 46.5,21.5 h1
  text "GND" at 28.3,16.9 h1.2
  text "12V" at 33.5,16.9 h1.2
  text "GND" at 46.5,15.4 h1
  text "M1" at 58.1,14 h1 r90
  text "12V" at 46.5,11.6 h1
  text "PWM" at 46.5,8.3 h1
Mechanical 1:
  the board outline again, w0.5

## Text inside footprints (layer, text, board x,y; h text height)
J8: Mechanical 13 "PCB Edge" at 1.3,16.7 h0.5 r270